# Altium PCB main.PcbDoc
Units mm, origin at the board's own origin, x right, y up, seen from the top; angles counter-clockwise.
Board outline 101 x 38 mm, 2 copper layers (Top Layer, Bottom Layer), stack 1.569 mm thick; 45 components, 26 nets, 127 pads, 38 vias.
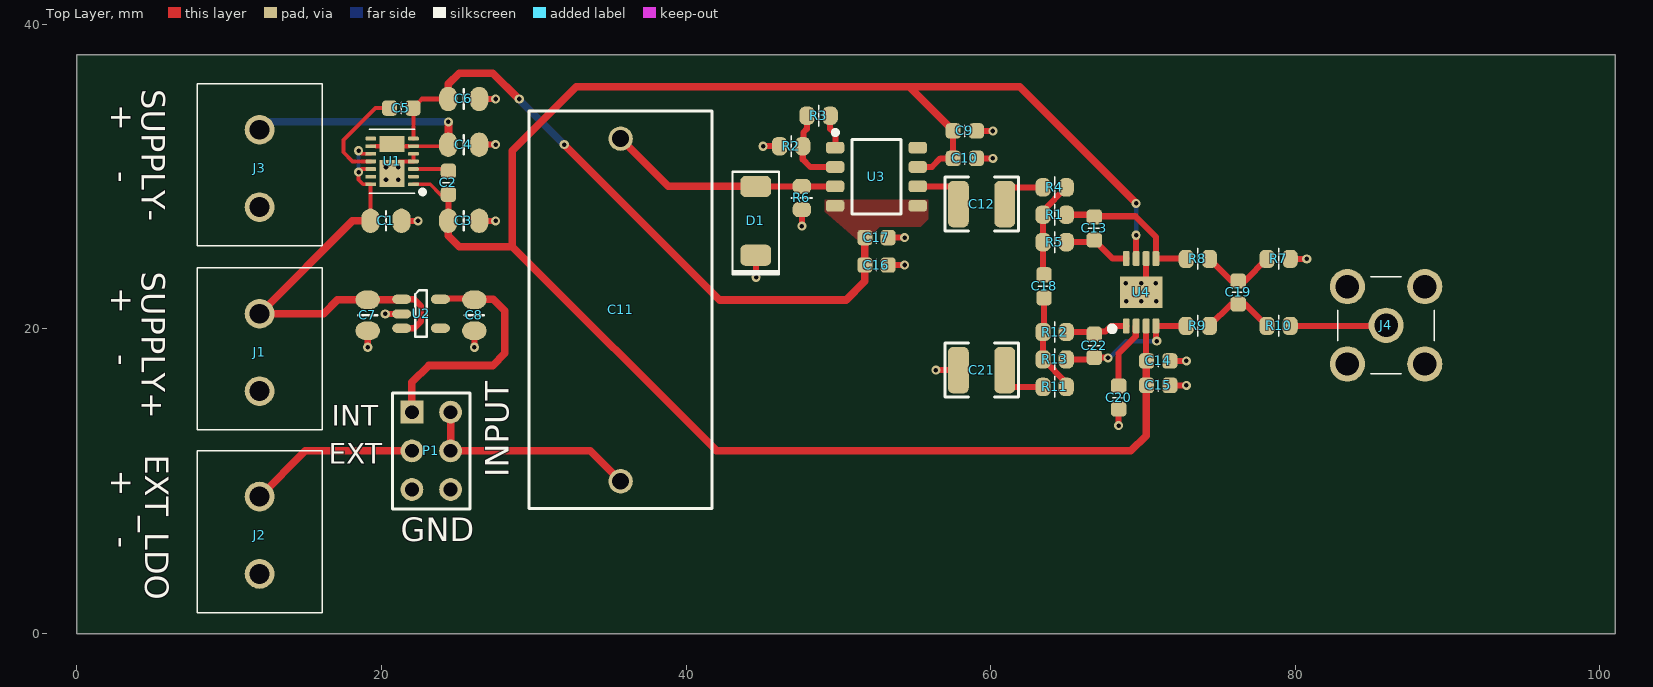
[diagram p0: Top Layer view]
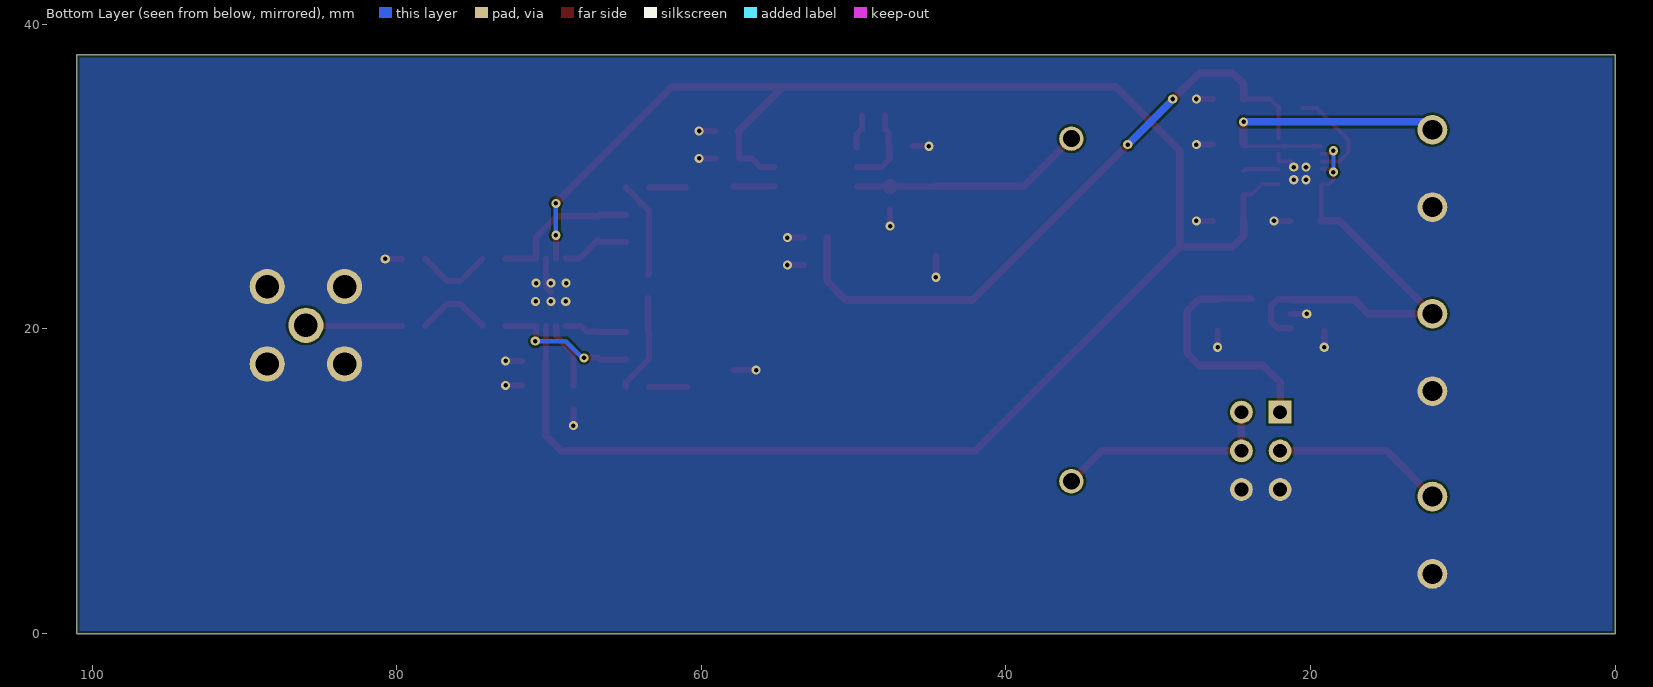
[diagram p1: Bottom Layer view, seen from below]
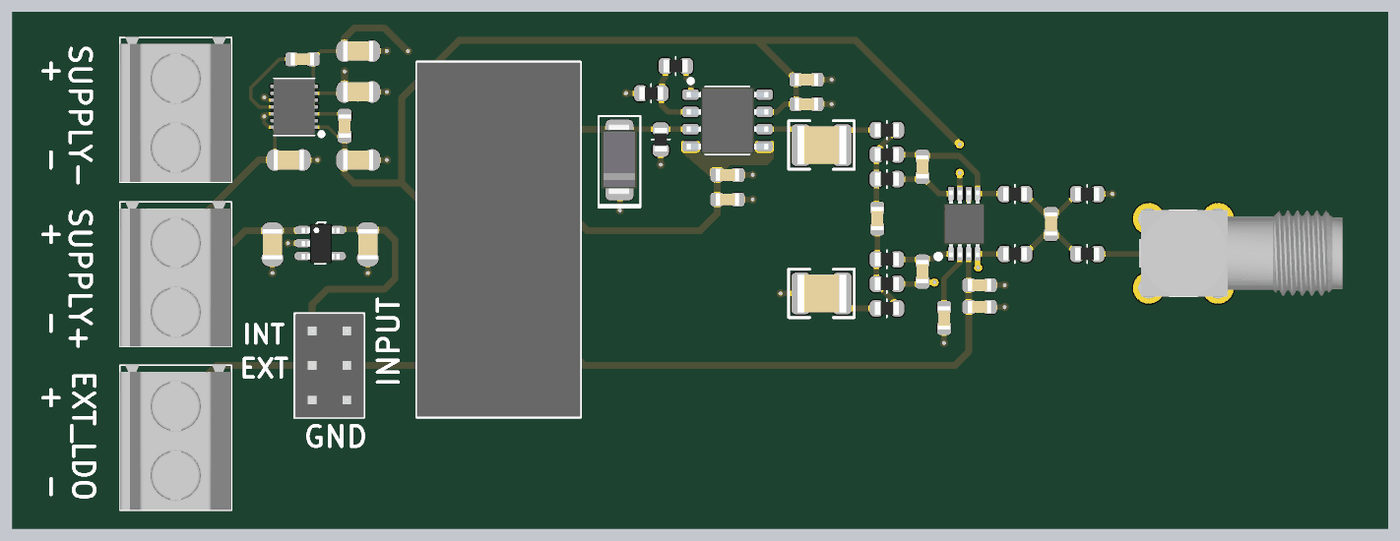
[diagram p2: 3D render of the assembled board from above, using the file's embedded part models]

## Layer stack, top to bottom
Top Solder: solder mask 0.0254, SM-001, Dk 4
Top Layer: signal copper 0.035
Dielectric 1: core 1.4986, Core-043, Dk 4.3
Bottom Layer: signal copper 0.035
Bottom Solder: solder mask 0.0254, SM-001, Dk 4

## Board outline
0,0 101,0 101,38 0,38

## Design rules (kind name [scope] priority, off if disabled: settings)
AssemblyTestPointUsage [All] p1: valid=2
AssemblyTestpoint [All] p1: testpointundercomponent=TRUE minsize=1.016 maxsize=2.54 preferedsize=1.524 minholesize=0 maxholesize=1.016 preferedholesize=0.813 testpointgrid=0.025 usegrid=FALSE gridtolerance=0 allowsidebottom=TRUE minspacing=3.13
BoardOutlineClearance [All] p1: gap=0.2 ignorepadtopadclearanceinfootprint=FALSE
Clearance [All] p1: gap=0.15 ignorepadtopadclearanceinfootprint=FALSE
ComponentClearance [All] p1: gap=0.25 collisioncheckmode=3 verticalgap=0.2 showdistances=TRUE
DiffPairsRouting [All] p1: maxlimit=0.254 minlimit=0.152 mostfreqgap=0.152 toplayer_minwidth=0.178 toplayer_maxwidth=0.381 toplayer_prefwidth=0.178 bottomlayer_minwidth=0.178 bottomlayer_maxwidth=0.381 bottomlayer_prefwidth=0.178 maxuncoupledlength=12.7
FabricationTestPointUsage TestPointUsage [All] p1: valid=0 allowmultiple=FALSE
FabricationTestpoint Testpoint [All] p1: side=2 testpointundercomponent=TRUE minsize=1.016 maxsize=2.54 preferedsize=1.524 minholesize=0.508 maxholesize=1.016 preferedholesize=0.813 testpointgrid=0.025 allowsidebottom=TRUE usegrid=FALSE gridtolerance=0 minspacing=2.35
Height [All] p1: minheight=0 maxheight=100 prefheight=12.7
HoleSize [All] p1: absolutevalues=TRUE maxlimit=10 minlimit=0.3 maxpercent=80.000 minpercent=20.000
HoleToHoleClearance [All] p1: gap=0.25 allowstackedmicrovias=TRUE
MinimumAnnularRing [All] p1: minimumring=0.15
MinimumSolderMaskSliver [All] p1: minsoldermaskwidth=0
PlaneConnect [All] p1: planeconnectstyle=Direct reliefexpansion=0.508 reliefentries=4 reliefconductorwidth=0.254 reliefairgap=0.254
PolygonConnect PolygonConnect_4 [All vs IsNamedPolygon('NONET_L-01_P-001')] p1: connectstyle=Direct reliefconductorwidth=0.254 reliefentries=4 polygonreliefangle="90 Angle" airgapwidth=0.254
PolygonConnect PolygonConnect_3 [All vs IsNamedPolygon('NONET_L-01_P-001')] p2: thpad.connectstyle=Relief thpad.reliefconductorwidth=0.254 thpad.reliefentries=4 thpad.polygonreliefangle="90 Angle" thpad.airgapwidth=0.254 smdpad.connectstyle=Relief smdpad.reliefconductorwidth=0.254 smdpad.reliefentries=4 smdpad.polygonreliefangle="45 Angle" smdpad.airgapwidth=0.254 via.connectstyle=Relief via.reliefconductorwidth=0.254 via.reliefentries=4 via.polygonreliefangle="90 Angle" via.airgapwidth=0.254
PolygonConnect relief_1 [All vs IsNamedPolygon('NONET_L-01_P-001')] p3: thpad.connectstyle=Relief thpad.reliefconductorwidth=0.254 thpad.reliefentries=4 thpad.polygonreliefangle="45 Angle" thpad.airgapwidth=0.254 smdpad.connectstyle=Relief smdpad.reliefconductorwidth=0.254 smdpad.reliefentries=4 smdpad.polygonreliefangle="90 Angle" smdpad.airgapwidth=0.254 via.connectstyle=Relief via.reliefconductorwidth=0.254 via.reliefentries=4 via.polygonreliefangle="90 Angle" via.airgapwidth=0.254
PolygonConnect relief [All vs IsNamedPolygon('NONET_L-01_P-001')] p4: connectstyle=Relief reliefconductorwidth=0.254 reliefentries=4 polygonreliefangle="90 Angle" airgapwidth=0.254
PolygonConnect PolygonConnect_2 [All vs IsNamedPolygon('NONET_L-01_P-001')] p5: connectstyle=Relief reliefconductorwidth=0.254 reliefentries=4 polygonreliefangle="90 Angle" airgapwidth=0.254
PolygonConnect PolygonConnect_1 [All vs IsNamedPolygon('NONET_L-01_P-001')] p6: connectstyle=Relief reliefconductorwidth=0.254 reliefentries=4 polygonreliefangle="90 Angle" airgapwidth=0.254
PolygonConnect [All] p7: connectstyle=Direct reliefconductorwidth=0.381 reliefentries=4 polygonreliefangle="45 Angle" airgapwidth=0.254
RoutingVias [All] p1: holewidth=0.3 width=0.5 viastyle="Through Hole" minholewidth=0.3 minwidth=0.5 maxholewidth=20 maxwidth=30
SilkToSolderMaskClearance [IsPad] p1: minsilkscreentomaskgap=0.076 clearancetoexposedcopper=TRUE
SolderMaskExpansion [All] p1: expansion=0.102 istentingtop=FALSE
UnRoutedNet [All] p1: checkbadconnections=TRUE
Width [All] p1: maxlimit=5.08 minlimit=0.15 preferedwidth=0.15
17 further rules are at their usual default settings.

## Components (designator, comment, footprint, x,y, rotation, side; value= is the part's Value field where it differs from the comment)
C1 "C_10UF_25V_X5R_0805_20" C_0805_2012 20.3,27.1 r0 top
C2 "C_1NF_50V_C0G_0603_5" C_0603_1608 24.4,29.6 r90 top
C3 "C_10UF_25V_X5R_0805_20" C_0805_2012 25.4,27.1 r0 top
C4 "C_10UF_25V_X5R_0805_20" C_0805_2012 25.4,32.1 r180 top
C5 "C_1NF_50V_C0G_0603_5" C_0603_1608 21.3,34.5 r0 top
C6 "C_10UF_25V_X5R_0805_20" C_0805_2012 25.4,35.1 r180 top
C7 "C_10UF_25V_X5R_0805_20" C_0805_2012 19.1,20.9 r270 top
C8 "C_10UF_25V_X5R_0805_20" C_0805_2012 26.1,20.9 r270 top
C9 "C_100NF_50V_X7R_0603_5" C_0603_1608 58.3,33 r0 top
C10 "C_1NF_50V_C0G_0603_5" C_0603_1608 58.3,31.2 r0 top
C11 "C" CP_22.5mm_tht 35.7,32.5 r270 top
C12 "C_47UF_10V_X5R_1210_10" C_1210_3225 59.4,28.2 r180 top
C13 "C_15PF_50V_C0G_0603_5" C_0603_1608 66.8,26.6 r270 top
C14 "C_100NF_50V_X7R_0603_5" C_0603_1608 71,17.9 r0 top
C15 "C_1NF_50V_C0G_0603_5" C_0603_1608 71,16.3 r0 top
C16 "C_100NF_50V_X7R_0603_5" C_0603_1608 52.5,24.2 r0 top
C17 "C_1NF_50V_C0G_0603_5" C_0603_1608 52.5,26 r0 top
C18 "C_1NF_50V_C0G_0603_5" C_0603_1608 63.5,22.8 r270 top
C19 "C_1NF_50V_C0G_0603_5" C_0603_1608 76.25,22.4 r270 top
C20 "C_100NF_50V_X7R_0603_5" C_0603_1608 68.4,15.5 r270 top
C21 "C_47UF_10V_X5R_1210_10" C_1210_3225 59.4,17.3 r180 top
C22 "C_15PF_50V_C0G_0603_5" C_0603_1608 66.8,18.9 r90 top
D1 "1SMA5913BT3G" SMA-2 44.6,27.1 r90 top
J1 "TB006-508-02BE" TB00650802BE 12,15.92 r90 top
J2 "TB006-508-02BE" TB00650802BE 12,3.92 r90 top
J3 "TB006-508-02BE" TB00650802BE 12,28 r90 top
J4 "73100-0115" 731000115 85.96,20.24 r180 top
P1 "826925-3" HEADER_M_2x3_2.54 22,14.54 r270 top
R1 "R_6K04_0603_1" R_0603_1608 64.2,27.5 r0 top
R2 "R_10R_0603_1" R_0603_1608 46.9,32 r0 top
R3 "R_499R_0603_1" R_0603_1608 48.7,34 r0 top
R4 "R_100R_0603_1" R_0603_1608 64.2,29.3 r0 top
R5 "R_100R_0603_1" R_0603_1608 64.2,25.7 r0 top
R6 "R_1K_0603_1" R_0603_1608 47.6,28.6 r90 top
R7 "R_100R_0603_1" R_0603_1608 78.9,24.6 r0 top
R8 "R_7R5_0603_1" R_0603_1608 73.6,24.6 r0 top
R9 "R_7R5_0603_1" R_0603_1608 73.6,20.2 r0 top
R10 "R_49R9_0603_1" R_0603_1608 78.9,20.2 r0 top
R11 "R_100R_0603_1" R_0603_1608 64.2,16.2 r0 top
R12 "R_100R_0603_1" R_0603_1608 64.2,19.8 r0 top
R13 "R_6K04_0603_1" R_0603_1608 64.2,18 r0 top
U1 "LT3032EDE-3.3#PBF" LT3032EDE5PBF 20.7,31 r90 top
U2 "MIC5504-3.3YM5-TR" SOT23-5_SC74A_SOT753_M 22.6,21 r270 top
U3 "LTC6228IS8#PBF" SOIC127P599X175-8N 52.5,30 r0 top
U4 "LTC6406CMS8E#PBF" SOP65P490X110-9N 69.875,22.412 r90 top

## Footprints (in the part's own frame and the unit in brackets; to place one, negate y for a bottom-side part, rotate by r counter-clockwise, add the part's x,y. Pads: shape width x height; smd on the part's side, far side on the other; paste and mask are expansions set on the pad)
731000115 [mm]
  round 2.31 hole 1.54: 1(0,0) 2(-2.54,2.54) 3(-2.54,-2.54) 4(2.54,-2.54) 5(2.54,2.54)
  silkscreen extent -3.18,-3.18 3.17,3.17, body extent -11.69,-3.19 3.11,3.16, height 9.6
C_0603_1608 [mil]
  rrect50% 39x40 smd mask+1.97: 1(-30,0) 2(30,0)
  silkscreen extent 0,-15 0,15, body extent -33,-18 33,18, height 35
C_0805_2012 [mm]
  oval 1.2x1.6 smd mask+0.05: 1(-1.016,0) 2(1.016,0)
  silkscreen extent 0,-0.64 0,0.64, body extent -1.1,-0.72 1.1,0.73, height 1.34
C_1210_3225 [mil]
  rrect50% 54x120 smd: 1(-60,0) 2(60,0)
  silkscreen extent -95,-70 95,70, body extent -72,-55 70,55, height 86
CP_22.5mm_tht [mm]
  round 1.6 hole 1.1 mask+0.05: 1(0,0) 2(22.5,0)
  silkscreen extent -1.8,-6 24.3,6, body extent -1.75,-6 24.25,6, height 21.6
HEADER_M_2x3_2.54 [mm] "Connector; Header; 3x2 Position"
  rect 1.5x1.5 hole 0.9: 1(0,0)
  round 1.5 hole 0.9: 2(0,2.54) 3(2.54,0) 4(2.54,2.54) 5(5.08,0) 6(5.08,2.54)
  silkscreen extent -1.27,-1.27 6.35,3.81, body extent -1.27,-1.23 6.35,3.81, height 8.5
LT3032EDE5PBF [mm]
  rrect50% 0.25x0.7 smd: 1(-1.5,-1.4) 2(-1,-1.4) 3(-0.5,-1.4) 4(0,-1.4) 5(0.5,-1.4) 6(1,-1.4) 7(1.5,-1.4) 8(1.5,1.4) 9(1,1.4) 10(0.5,1.4) 11(0,1.4) 12(-0.5,1.4) 13(-1,1.4) 14(-1.5,1.4)
  rect 1.78x1.65 smd: 15(-0.79,0)
  rect 1.07x1.65 smd: 16(1.145,0)
  Top Layer region: 1.125,-1.112 1.125,-0.825 0.875,-0.825 0.875,-1.112
  Top Layer region: -0.05,-1.05
  Top Layer region: -0.125,-1.112 -0.125,-0.825 0.1,-0.825 0.125,-0.85 0.125,-1.112
  Top Layer region: 0.875,1.112 0.875,0.825 1.125,0.825 1.125,1.112
  silkscreen extent -2.14,-2.14 2.1,1.5, body extent -2,-1.5 2,1.5, height 0.9
R_0603_1608 [mm]
  rrect75% 1x1.2 smd mask+0.1: 1(-0.762,0) 2(0.762,0)
  silkscreen extent 0,-0.69 0,0.69, body extent -0.87,-0.47 0.88,0.48, height 0.54
SMA-2 [mil]
  rrect50% 55x80 smd mask+1.97: 1(-89,0.98) 2(89,0.98)
  silkscreen extent -141,-59 127,61, body extent -100,-49 104,53, height 95
SOIC127P599X175-8N [mm]
  rrect50% 1.2x0.76 smd: 1(-2.712,1.905) 2(-2.712,0.635) 3(-2.712,-0.635) 4(-2.712,-1.905) 5(2.712,-1.905) 6(2.712,-0.635) 7(2.712,0.635) 8(2.712,1.905)
  silkscreen extent -2.8,-2.45 1.6,3, body extent -3,-2.45 3,2.45, height 1.75
SOP65P490X110-9N [mm]
  rrect50% 1x0.45 smd: 1(-2.212,0.975) 2(-2.212,0.325) 3(-2.212,-0.325) 4(-2.212,-0.975) 5(2.212,-0.975) 6(2.212,-0.325) 7(2.212,0.325) 8(2.212,0.975)
  rect 2.08x2.8 smd: 9(0,0)
  silkscreen extent -2.55,1.75 -2.25,2.05, body extent -2.45,-1.5 2.45,1.5, height 1.1
SOT23-5_SC74A_SOT753_M [mm]
  oval 0.6x1.25 smd paste+0 mask+0.05: 1(-0.952,-1.27) 2(0.013,-1.27) 3(0.953,-1.27) 4(0.952,1.27) 5(-0.953,1.27)
  silkscreen extent -1.54,-0.38 1.51,0.38, body extent -1.41,-1.35 1.49,1.45, height 1.45
TB00650802BE [mm]
  round 1.95 hole 1.3: 1(0,0) 2(5.08,0)
  silkscreen extent -2.54,-4.1 8.1,4.1, body extent -2.53,-4.1 8.13,4.1, height 10

## Part data
C1 C3 C4 C6 C7 C8: "Ceramic Capacitor", Capacitance=10uF, Case/Package=0805, Dielectric=X5R, Manufacturer="Taiyo Yuden", Manufacturer Part Number=TMK212BBJ106MG-T, Max Operating Temperature=85, Supplier Part Number 1=963-TMK212BBJ106MG-T, Tolerance=20%, Voltage Rating (DC)=25V, Height=1.25mm, HelpURL=https://pl.mouser.com/datasheet/2/396/mlcc02_e-1307760.pdf, Mount="Surface Mount", Part Number=C_10UF_25V_X5R_0805_20, RoHS=Compliant, Status=MK, Supplier 1=Mouser
C2 C5 C10 C15 C17 C18 C19: "Ceramic Capacitor", Capacitance=1nF, Case/Package=0603, Dielectric=C0G, Tolerance=10%, Voltage Rating (DC)=50V, Height=0mm, Mount="Surface Mount", Part Number=C_1NF_50V_C0G_0603_5
C9 C14 C16 C20: "Ceramic Capacitor", Capacitance=100nF, Case/Package=0603, Dielectric=X7R, Manufacturer=Yageo, Manufacturer Part Number=CC0603JRX7R9BB104, Max Operating Temperature=125, Tolerance=5%, Voltage Rating (DC)=50V, Height=0mm, HelpURL=http://datasheet.octopart.com/CC0603JRX7R9BB104-Yageo-datasheet-10883670.pdf, Mount="Surface Mount", Part Number=C_100NF_50V_X7R_0603_5
C11: library part CP_4U7_250V_22.5mm_10, "Film Capacitors 250VDC 4.7uF 10% MPET L/S=22.5mm", Capacitance=4.7u, Voltage Rating (DC)=250V
C12 C21: "Ceramic Capacitor", Capacitance=47uF, Case/Package=1210, Dielectric=X5R, Max Operating Temperature=85, Tolerance=10%, Voltage Rating (DC)=10V, Height=2.5mm, Mount="Surface Mount", Part Number=C_47UF_10V_X5R_1210_10
C13 C22: "Ceramic Capacitor", Capacitance=15pF, Case/Package=0603, Dielectric=C0G, Tolerance=10%, Voltage Rating (DC)=50V, Height=0mm, Mount="Surface Mount", Part Number=C_15PF_50V_C0G_0603_5
D1: "Zener Diodes 3.3V 1.5W"
J1 J2 J3: "Fixed Terminal Blocks Terminal block, screw type, 5.08 , horizontal, 2 poles, CUI Blue, slotted screw, PCB mount", Manufacturer_Name="CUI Devices", Mouser Part Number=490-TB006-508-02BE, Arrow Part Number=TB006-508-02BE, Arrow Price/Stock=https://www.arrow.com/en/products/tb006-508-02be/cui-devices, Datasheet Link=https://www.mouser.com/datasheet/2/670/tb006-508-1550645.pdf, Height=10.4mm, Manufacturer_Part_Number=TB006-508-02BE, Mouser Price/Stock=https://www.mouser.co.uk/ProductDetail/CUI-Devices/TB006-508-02BE?qs=vLWxofP3U2wEdOVV%2FaT04w%3D%3D
J4: "SMA right angle connector female", Manufacturer_Name=Molex, Mouser Part Number=538-73100-0115, Datasheet Link=https://www.molex.com/pdm_docs/sd/731000115_sd.pdf, Height=9.57mm, Manufacturer_Part_Number=73100-0115, Mouser Price/Stock=https://www.mouser.co.uk/ProductDetail/Molex/73100-0115?qs=dxVETAvtHz69wpck%252B7ItSw%3D%3D
P1: "Header, 3-Pin, Dual row", Manufacturer="TE Connectivity", Max Operating Temperature=0°C, Gender=Male, HelpURL=https://octopart.com/datasheet/826925-3-te+connectivity-41192668, Manufacturer Part Number=826925-3, Mount="Through Hole", Number of Pins=6, Number of Rows=2, Orientation=Straight, Part Number=826925-3, Pitch=2.54mm
R1 R13: "Thin Film Resistor", Case/Package=0603, Manufacturer=Yageo, Manufacturer Part Number=RT0603FRE076K04L, Max Operating Temperature=155, Power Rating=100mW, Resistance=6.04K, Supplier Part Number 1=603-RT0402BRD076K04L, Tolerance=1%, Voltage Rating (DC)=50V, Height=0.3mm, HelpURL=https://pl.mouser.com/datasheet/2/447/PYu-RT_1-to-0.01_RoHS_L_11-1669912.pdf, Mount="Surface Mount", Part Number=R_6K04_0603_1, RoHS=Compliant, Stats=MK, Stock=0, Supplier 1=Mouser
R2: Case/Package=0603, Max Operating Temperature=155°C, Power Rating=100mW, Resistance=10R, Tolerance=1%, Voltage Rating (DC)=50V, Height=0.45mm, Mount="Surface Mount", Part Number=R_10R_0603_1
R3: "Thin Film Resistors", Case/Package=0603, Manufacturer=Yageo, Manufacturer Part Number=RT0603FRE07499RL, Max Operating Temperature=155, Power Rating=100mW, Resistance=499R, Supplier Part Number 1=603-RT0402BRD07499RL, Tolerance=1%, Voltage Rating (DC)=50V, Height=0.45mm, HelpURL=https://pl.mouser.com/datasheet/2/447/PYu-RT_1-to-0.01_RoHS_L_11-1669912.pdf, Mount="Surface Mount", Part Number=R_499R_0603_1, RoHS=Compliant, Stats=MK, Supplier 1=Mouser
R4 R5 R7 R11 R12: Case/Package=0603, Max Operating Temperature=0°C, Power Rating=125mW, Resistance=100R, Tolerance=1%, Voltage Rating (DC)=50V, Height=0.45mm, Mount="Surface Mount", Part Number=R_100R_0603_1
R6: Case/Package=0603, Max Operating Temperature=0°C, Power Rating=100mW, Resistance=1k, Tolerance=1%, Height=0.45mm, Mount="Surface Mount", Part Number=R_1K_0603_1
R8 R9: "Thin Film Resistor", Case/Package=0603, Manufacturer=Yageo, Manufacturer Part Number=RT0603FRE077R5L, Max Operating Temperature=155°C, Power Rating=100mW, Resistance=7R5, Supplier Part Number 1=603-RT0603FRE077R5L, Tolerance=1%, Voltage Rating (DC)=50V, Height=0.45mm, HelpURL=https://pl.mouser.com/datasheet/2/447/PYu-RC_Group_51_RoHS_L_10-1664068.pdf, Mount="Surface Mount", Part Number=R_7R5_0603_1, RoHS=Compliant, Stats=MK, Supplier 1=Mouser
R10: "Thin Film Resistors", Case/Package=0603, Manufacturer=Yageo, Manufacturer Part Number=RT0603FRE0749R9L, Max Operating Temperature=155°C, Power Rating=100mW, Resistance=49R9, Supplier Part Number 1=603-RT0603FRE0749R9L, Tolerance=1%, Voltage Rating (DC)=50V, Height=0.45mm, HelpURL=https://pl.mouser.com/datasheet/2/447/PYu-RT_1-to-0.01_RoHS_L_11-1669912.pdf, Mount="Surface Mount", Part Number=R_49R9_0603_1, RoHS=Compliant, Stats=MK, Supplier 1=Mouser
U1: library part LT3032EDE-5#PBF, "LDO Voltage Regulators Dual 200mA Positive/Negative, Low Noise, Low Dropout Linear Regulator / RoHS Compliant", Manufacturer_Name="Analog Devices", Mouser Part Number=584-LT3032EDE-3.3PBF, Arrow Part Number=LT3032EDE-3.3#PBF, Arrow Price/Stock=https://www.arrow.com/en/products/lt3032ede-5pbf/analog-devices, Datasheet Link=https://www.arrow.com/en/products/lt3032ede-5pbf/analog-devices, Height=0.8mm, Manufacturer_Part_Number=LT3032EDE-3.3#PBF, Mouser Price/Stock=https://www.mouser.co.uk/ProductDetail/Analog-Devices/LT3032EDE-5PBF?qs=ytflclh7QUXSJKCH531bKg%3D%3D
U2: "LDO Voltage Regulators Single 300mA LDO", Case/Package=SOT23-5, Dropout Voltage=160mV, Manufacturer=Microchip, Max Input Voltage=5.5V, Max Operating Temperature=125°C, Max Output Current=300mA, Max Output Voltage=3.3V, Max Power Dissipation=660mW, Min Input Voltage=3.7V, Min Output Voltage=3.2V, Quiescent Current=38µA, Supplier Part Number 1=998-MIC5504-3.3YM5TR, Accuracy=0,02, Height=1.45mm, HelpURL=https://pl.mouser.com/datasheet/2/268/MIC550X-1082389.pdf, Manufacturer Part Number=MIC5504-3.3YM5-TR, Mount="Surface Mount", Nominal Output Voltage=3.3V, Number of Pins=5, Output Type=Fixed, Part Number=MIC5504-3.3YM5-TR, Polarity=Positive, RoHS=Compliant, Status=TC, Supplier 1=Mouser
U3: "High Speed Operational Amplifiers Precision Low Drift & Noise HiSpeed", Manufacturer_Name="Analog Devices", Mouser Part Number=584-LTC6228IS8#PBF, Arrow Part Number=LTC6228IS8#PBF, Arrow Price/Stock=https://www.arrow.com/en/products/ltc6228is8pbf/analog-devices, Datasheet Link=https://www.analog.com/media/en/technical-documentation/data-sheets/LTC6228-6229.pdf, Height=1.752mm, Manufacturer_Part_Number=LTC6228IS8#PBF, Mouser Price/Stock=https://www.mouser.co.uk/ProductDetail/Analog-Devices/LTC6228IS8PBF?qs=vLWxofP3U2wRr189Jtjlaw%3D%3D
U4: "High Speed Operational Amplifiers 800 MHz, Low Noise, Rail to Rail Input Differential Amplifier/Driver", Manufacturer_Name="Analog Devices", Mouser Part Number=584-LTC6406CMS8E#PBF, Arrow Part Number=LTC6406CMS8E#PBF, Arrow Price/Stock=https://www.arrow.com/en/products/ltc6406cms8epbf/analog-devices, Datasheet Link=https://www.mouser.com/ProductDetail/Analog-Devices/LTC6406CMS8EPBF?qs=hVkxg5c3xu8Lz%2FyrMffn3w%3D%3D, Height=1.1mm, Manufacturer_Part_Number=LTC6406CMS8E#PBF, Mouser Price/Stock=https://www.mouser.com/Search/Refine.aspx?Keyword=584-LTC6406CMS8E%23PBF

## Via types
v1: diameter 0.6, hole 0.3, Top Layer to Bottom Layer, tented both sides, 34 vias
v2: diameter 0.6, hole 0.3, Top Layer to Bottom Layer, 4 vias

## Nets (pads, with @x,y where several pads share a name; then routed paths per layer and width w, separated by ;. In a path a pad name is that pad's centre, name@x,y a point inside that pad or via, vN(x,y) a via of type N, cw(c..) or ccw(c..) an arc to the next point about the centre after c; other vN are vias at no path point)
1ST_STAGE_OUT: C12.2 U3.6 | length 2.7
  Top Layer w0.4: U3.6 C12.2@57.9,29.365
2ST_STAGE_OUT+: C19.2 R9.2 R10.1 | length 5
  Top Layer w0.4: R9.2 75.8,21.638 C19.2 76.7,21.638 R10.1
2ST_STAGE_OUT-: C19.1 R7.1 R8.2 | length 5
  Top Layer w0.4: R8.2 75.8,23.162 C19.1 76.7,23.162 R7.1
+3V3: C2.1 C3.1 C9.1 C10.1 C14.1 C15.1 U1.1 U3.7 U4.3 U4.7 | length 128.8
  Top Layer w0.25: U1.1 23.2,29.5 23.862,28.838 C2.1
  Top Layer w0.4: C3.1 24.4,27.116 C2.1 ; U3.7 56.135,30.635 56.7,31.2 C10.1 C9.1 ; U4.7 v2(69.55,26.15) ; U4.3 70.2,17.938 C14.1
  Top Layer w0.5: C3.1 24.384,26.116 25.1,25.4 28.6,25.4 ; C9.1 54.638,35.9 ; v2(69.55,28.25) 61.9,35.9 54.638,35.9 ; C14.1@70.2,17.9 70.2,16.3 70.2,13 69.2,12 42,12 28.6,25.4 ; 28.6,25.4 28.6,31.7 32.8,35.9 54.638,35.9
  Bottom Layer w0.3: v2(69.55,26.15) v2(69.55,28.25)
-3V3: C5.2 C6.2 C16.1 C17.1 U1.7 U3.4 U3.5 | length 42.8
  Top Layer w0.25: U1.7 C5.2@22.1,34.462
  Top Layer w0.3: C5.2@22.1,34.462 C5.2 22.662,35.1 C6.2
  Top Layer w0.5: C6.2 24.384,36.084 25.1,36.8 27.3,36.8 29,35.1 v1(29.05,35.1) ; v1(32,32.1) 42.2,21.9 50.5,21.9 51.738,23.138 C16.1 C17.1
  Bottom Layer w0.5: v1(29.05,35.1) 29.05,35.05 v1(32,32.1)
EXTERNAL_LDO_OUT: J2.2 P1.3 | length 11.2
  Top Layer w0.5: J2.2 15,12 P1.3
GND: C1.2 C3.2 C4.1 C6.1 C7.2 C8.2 C9.2 C10.2 C14.2 C15.2 C16.2 C17.2 C20.2 C21.2 D1.1 J1.1 J2.1 J3.1 J4.2 J4.3 J4.4 J4.5 P1.5 P1.6 R2.1 R6.1 R7.2 U1.4 U1.5 U1.15 U2.2 U4.6 U4.9 | length 25.1
  Top Layer w0.25: U1.15@21.189,30.988 U1.4@22.1,30.988 ; U1.4 U1.5
  Top Layer w0.4: v1(19.1,18.8) C7.2 ; v1(20.246,20.987) U2.2 ; C1.2 v1(22.4,27.1) ; v1(26.1,18.8) C8.2 ; C3.2 v1(27.5,27.1) ; C4.1 v1(27.5,32.1) ; C6.1 v1(27.5,35.1) ; D1.1 44.6,24.814 v1(44.6,23.4) ; v1(45.054,32) R2.1 ; v1(47.6,26.754) R6.1 ; C16.2 v1(54.346,24.2) ; C17.2 v1(54.346,26) ; v1(56.4,17.3) C21.2 ; C10.2 v1(60.146,31.2) ; C9.2 v1(60.146,33) ; v1(68.4,13.654) C20.2 ; U4.9 70.2,22.737 U4.6 ; C15.2 v1(72.846,16.3) ; C14.2 v1(72.846,17.9) ; R7.2 v1(80.746,24.6)
  other v1: 68.9,21.812 69.875,21.812 70.875,21.812 68.875,23.012 69.875,23.012 70.85,23.012 20.3,29.8 21.1,29.8 20.3,30.625 21.1,30.625
INTERNAL_LDO_OUT: C8.1 P1.1 U2.5 | length 16.2
  Top Layer w0.4: U2.5 23.917,22 26.016,22 C8.1
  Top Layer w0.5: P1.1 22,16.5 23.1,17.6 27.3,17.6 28.1,18.4 28.1,21.2 27.348,21.952 C8.1@26.1,21.952
MEASUREMENT_INPUT: C11.2 P1.2 P1.4 | length 14.5
  Top Layer w0.5: P1.2 P1.4 33.7,12 C11.2
NetC2_2: C2.2 U1.3 | length 2.4
  Top Layer w0.25: U1.3 24.262,30.5 C2.2
NetC5_1: C5.1 U1.11 | length 6.8
  Top Layer w0.25: U1.11 18.1,31 17.5,31.6 17.5,32.4 19.6,34.5 C5.1
NetC11_1: C11.1 D1.2 R6.2 U3.3 | length 15.4
  Top Layer w0.4: D1.2 R6.2@47.599,29.361 ; R6.2 49.785,29.362 U3.3
  Top Layer w0.5: C11.1 38.839,29.361 D1.2
  Top Layer w1: R6.2@47.599,29.361 R6.2
NetC12_1: C12.1 R4.1 | length 2.4
  Top Layer w0.4: C12.1@61,29.3 R4.1
NetC13_1: C13.1 R1.2 R8.1 U4.5 | length 9.9
  Top Layer w0.4: R1.2 66.662,27.5 C13.1 66.838,27.4 69.5,27.4 70.85,26.05 U4.5 72.814,24.624 R8.1
NetC13_2: C13.2 R5.2 U4.8 | length 4.5
  Top Layer w0.4: R5.2 66.662,25.7 C13.2 68.014,24.624 U4.8
NetC18_1: C18.1 R1.1 R4.2 R5.1 | length 6.4
  Top Layer w0.3: R1.1 R1.1@63.438,27.776
  Top Layer w0.4: R1.1 R5.1 63.438,23.624 C18.1 ; R1.1@63.438,27.776 R4.2
NetC18_2: C18.2 R11.2 R12.1 R13.1 | length 6.5
  Top Layer w0.4: C18.2 63.5,19.862 R12.1 R13.1 64.962,16.476 R11.2
NetC20_1: C20.1 U4.2 | length 4.4
  Top Layer w0.4: C20.1 68.4,18.4 69.525,19.525 69.525,20.175 U4.2
NetC21_1: C21.1 R11.1 | length 2.5
  Top Layer w0.4: C21.1@60.9,16.2 R11.1
NetC22_1: C22.1 R9.1 R13.2 U4.4 | length 9.4
  Top Layer w0.4: R13.2 66.662,18 C22.1 66.819,18.119 67.681,18.119 v2(67.7,18.1) ; v2(70.9,19.2) 70.85,19.25 U4.4 R9.1
  Bottom Layer w0.3: v2@67.75,18.05 68.9,19.2 v2(70.9,19.2)
NetC22_2: C22.2 R12.2 U4.1 | length 4.1
  Top Layer w0.4: R12.2 66.8,19.8 66.834,19.834 67.534,19.834 67.9,20.2 U4.1
NetJ4_1: J4.1 R10.2 | length 6.3
  Top Layer w0.4: R10.2 85.92,20.2 J4.1
NetR2_2: R2.2 R3.1 U3.2 | length 5.3
  Top Layer w0.4: R3.1 47.938,33.138 47.7,32.9 47.7,32.038 R2.2 47.662,31.138 48.165,30.635 U3.2
NetR3_2: R3.2 U3.1 | length 2.2
  Top Layer w0.4: R3.2 49.462,33.138 49.8,32.8 49.8,31.917 U3.1
SUPPLY+: C1.1 C7.1 J1.2 U1.10 U1.12 U1.14 U2.1 U2.3 | length 30.4
  Top Layer w0.25: v1(18.5,31.7) 18.7,31.5 U1.10 ; C1.1 19.284,29.484 U1.14 18.8,29.5 18.5,29.8 v1(18.5,30.3) 18.7,30.5 U1.12
  Top Layer w0.4: U2.1@21.293,21.916 U2.1 22.148,21.952 22.6,21.5 22.6,20.5 22.147,20.047 U2.3
  Top Layer w0.5: C1.1 18.1,27.1 J1.2 16.2,21 17.116,21.916 C7.1 U2.1@21.293,21.916
  Bottom Layer w0.25: v1(18.5,30.3) v1(18.5,31.7)
SUPPLY-: C4.2 J3.2 U1.6 U1.9 U1.16 | length 19.2
  Top Layer w0.25: U1.9 U1.6 24.284,32 C4.2
  Top Layer w0.4: C4.2 C4.2@24.4,32.116
  Top Layer w0.5: C4.2@24.4,32.116 v1(24.4,33.6)
  Bottom Layer w0.5: J3.2 12.52,33.6 v1(24.4,33.6)
pads on no net: U1.2 U1.8 U1.13 U2.4 U3.8

## Polygon pours and split planes (outlines as drawn)
-3V3 on Top Layer "NONET_L-01_P-001" (solid, remove dead copper, pour order 0): 49.1,28.5 55.9,28.5 55.9,27.2 55.4,26.7 52.7,26.7 51.8,25.8 51.3,25.8 49.1,27.7
GND on Bottom Layer "NONET_L-01_P-001" (solid, remove dead copper, pour order 1): 0,38 0,0 101,0 101,38

## Silkscreen, mask and mechanical layers (free items; w line width, h text height)
Top Overlay:
  text "SUPPLY-" at 4.254,35.746 h1.52 r270
  text "+    -" at 2.254,34.746 h1.52 r270
  text "SUPPLY+" at 4.254,23.746 h1.52 r270
  text "+    -" at 2.254,22.746 h1.52 r270
  text "INT" at 16.75,13.65 h1.35
  text "EXT_LDO" at 4.508,11.746 h1.52 r270
  text "EXT" at 16.554,11.154 h1.35
  text "+    -" at 2.254,10.746 h1.52 r270
  text "INPUT" at 28.346,10.254 h1.52 r90
  text "GND" at 21.254,6.054 h1.52